# EAGLE board CT_schematic (EAGLE 7.6.0)

Size 100 x 80 mm. Coordinates in mm from the lower left corner, seen from the top.
Outline: 0,0 100,0 100,80 0,80 0,0
Copper layers (1*16): Top 0.035mm / dielectric 1.5mm / Bottom 0.035mm
Design rules "default": minimum track width 10mil, minimum drill 24mil, track to track 8mil, track to pad 8mil, pad to pad 8mil, via to via 8mil, smd to smd 8mil, copper to edge 40mil, drill to drill 8mil, minimum pad ring 10mil, minimum via ring 8mil, stop-mask expansion 4mil, vias tented up to drill 0mil, thermal gap 10mil

## Footprints (pad centres in the part's own frame; a part is rotated, then mirrored left to right if it is on the bottom)
C0603 = smd 0.8 x 0.8: 1 -0.762,0; 2 0.762,0
C0402 = smd 0.5 x 0.5: 1 -0.508,0; 2 0.508,0
C1210 = smd 1.2 x 2.5: 1 -1.524,0; 2 1.524,0
R0603 = smd 0.8 x 0.8: 1 -0.762,0; 2 0.762,0
EXV-9H = smd 3.505 x 1.676: 1 -2.857,0; 2 2.857,0
L0603 = smd 0.8 x 0.8: 1 -0.762,0; 2 0.762,0
IND25X25CZ = smd 2.489 x 3.429: 1 -2.718,0; 2 2.718,0
PJ-037B_PACKAGE = drill 3.7 square: 1 12,0 | drill 3.2 square: 2 6,0
TFBGA64 = smd 0.35 x 0.35: A1 -1.75,1.75; A2 -1.25,1.75; A3 -0.75,1.75; A4 -0.25,1.75; A5 0.25,1.75; A6 0.75,1.75; A7 1.25,1.75; A8 1.75,1.75; B1 -1.75,1.25; B2 -1.25,1.25; B3 -0.75,1.25; B4 -0.25,1.25; B5 0.25,1.25; B6 0.75,1.25; B7 1.25,1.25; B8 1.75,1.25; C1 -1.75,0.75; C2 -1.25,0.75; C3 -0.75,0.75; C4 -0.25,0.75; C5 0.25,0.75; C6 0.75,0.75; C7 1.25,0.75; C8 1.75,0.75; D1 -1.75,0.25; D2 -1.25,0.25; D3 -0.75,0.25; D4 -0.25,0.25; D5 0.25,0.25; D6 0.75,0.25; D7 1.25,0.25; D8 1.75,0.25; E1 -1.75,-0.25; E2 -1.25,-0.25; E3 -0.75,-0.25; E4 -0.25,-0.25; E5 0.25,-0.25; E6 0.75,-0.25; E7 1.25,-0.25; E8 1.75,-0.25; F1 -1.75,-0.75; F2 -1.25,-0.75; F3 -0.75,-0.75; F4 -0.25,-0.75; F5 0.25,-0.75; F6 0.75,-0.75; F7 1.25,-0.75; F8 1.75,-0.75; G1 -1.75,-1.25; G2 -1.25,-1.25; G3 -0.75,-1.25; G4 -0.25,-1.25; G5 0.25,-1.25; G6 0.75,-1.25; G7 1.25,-1.25; G8 1.75,-1.25; H1 -1.75,-1.75; H2 -1.25,-1.75; H3 -0.75,-1.75; H4 -0.25,-1.75; H5 0.25,-1.75; H6 0.75,-1.75; H7 1.25,-1.75; H8 1.75,-1.75
TST-110-05-T-D-RA = drill 1 pad 1.7 square: 1 0,0 | drill 1 pad 1.7: 2 0,2.54; 3 2.54,0; 4 2.54,2.54; 5 5.08,0; 6 5.08,2.54; 7 7.62,0; 8 7.62,2.54; 9 10.16,0; 10 10.16,2.54; 11 12.7,0; 12 12.7,2.54; 13 15.24,0; 14 15.24,2.54; 15 17.78,0; 16 17.78,2.54; 17 20.32,0; 18 20.32,2.54; 19 22.86,0; 20 22.86,2.54
LGA-16 = smd 1.5 x 0.4: 1 -2.1,0.975; 2 -2.1,0.325; 3 -2.1,-0.325; 4 -2.1,-0.975; 9 2.1,-0.975; 10 2.1,-0.325; 11 2.1,0.325; 12 2.1,0.975 | smd 0.4 x 1.5: 5 -0.975,-2.1; 6 -0.325,-2.1; 7 0.325,-2.1; 8 0.975,-2.1; 13 0.975,2.1; 14 0.325,2.1; 15 -0.325,2.1; 16 -0.975,2.1
SSOP-28 = smd 1.5 x 0.4: 1 -3.625,4.225; 2 -3.625,3.575; 3 -3.625,2.925; 4 -3.625,2.275; 5 -3.625,1.625; 6 -3.625,0.975; 7 -3.625,0.325; 8 -3.625,-0.325; 9 -3.625,-0.975; 10 -3.625,-1.625; 11 -3.625,-2.275; 12 -3.625,-2.925; 13 -3.625,-3.575; 14 -3.625,-4.225; 15 3.625,-4.225; 16 3.625,-3.575; 17 3.625,-2.925; 18 3.625,-2.275; 19 3.625,-1.625; 20 3.625,-0.975; 21 3.625,-0.325; 22 3.625,0.325; 23 3.625,0.975; 24 3.625,1.625; 25 3.625,2.275; 26 3.625,2.925; 27 3.625,3.575; 28 3.625,4.225
182-009-MALE = drill 1.194 pad 1.524 octagon: 1 -5.537,10.923; 2 -2.769,10.923; 3 0,10.923; 4 2.769,10.923; 5 5.537,10.923; 6 -4.153,8.08; 7 -1.384,8.08; 8 1.384,8.08; 9 4.153,8.08 | hole 3.048: -12.446,9.501; 12.446,9.501
USB-A-H = drill 0.914: 1 2.718,3.493; 2 2.718,1.003; 3 2.718,-1.003; 4 2.718,-3.493 | drill 2.311: 5 0,-6.566; 6 0,6.566
SOT143B = smd 1 x 0.7: 1 -0.75,-1 | smd 0.6 x 0.7: 2 0.95,-1; 3 0.95,1; 4 -0.95,1
ABLS-25.000MHZ-B2F-T = smd 5.6 x 2.8: 1 -3.81,0; 2 5.69,0
ASEK = smd 1.4 x 1: 1 -1.1,-0.8; 2 1.1,-0.8; 3 1.1,0.8; 4 -1.1,0.8
IR3899MTR1PBF = smd 0.25 x 0.75: 1 0,0; 2 0.5,0; 3 1,0; 4 1.5,0; 5 2,0; 6 2.5,0; 7 3,0 | smd 0.75 x 0.25: 8 3.425,0.78; 9 3.425,1.28; 10 3.425,1.78; 14 -0.425,1.78; 15 -0.425,1.28; 16 -0.425,0.78 | smd 0.3 x 1.95: 11 3.22,3.63 | smd 1.62 x 2.42: 12 1.786,3.8 | smd 1 x 1.95: 13 0.117,3.63 | smd 2.19 x 1.25: 17 1.51,1.26
SON-6 = smd 0.55 x 0.3: 1 -0.355,0.5 | smd 0.52 x 0.3: 2 -0.37,0; 3 -0.37,-0.5; 4 0.37,-0.5; 5 0.37,0; 6 0.37,0.5
SW_4-1437565-2 = smd 1.4 x 2.1: 1 -2.23,4.55; 2 -2.23,-4.55; 3 2.23,4.55; 4 2.23,-4.55
LGM67K-G1J2-24-Z = smd 0.8 x 1.4: A -2,0; C 0,0
NC7SZ125M5X = smd 1.3 x 0.7: 1 -1.3,0.95; 2 -1.3,0; 3 -1.3,-0.95; 4 1.3,-0.95; 5 1.3,0.95

## Placement (x,y rotation side)
C1  1e-07  [C0603]  -59.69,71.12 0 top  (outside the outline)
C2  1e-07  [C0603]  -63.5,71.12 0 top  (outside the outline)
C3  1e-07  [C0603]  -67.31,71.12 0 top  (outside the outline)
C4  1e-07  [C0603]  -71.12,71.12 0 top  (outside the outline)
C5  4.7e-06  [C0603]  -44.45,71.12 0 top  (outside the outline)
C6  1e-07  [C0603]  -74.93,71.12 0 top  (outside the outline)
C7  1e-08  [C0603]  -15.24,76.2 0 top  (outside the outline)
C8  1e-06  [C0603]  -19.05,76.2 0 top  (outside the outline)
C9  1e-11  [C0402]  -49.53,76.2 0 top  (outside the outline)
C10  1e-11  [C0402]  -53.34,76.2 0 top  (outside the outline)
C11  1e-07  [C0402]  -57.15,76.2 0 top  (outside the outline)
C12  1e-07  [C0402]  -60.96,76.2 0 top  (outside the outline)
C13  1e-08  [C0402]  -64.77,76.2 0 top  (outside the outline)
C14  1e-08  [C0402]  -68.58,76.2 0 top  (outside the outline)
C15  1e-08  [C0402]  -72.39,76.2 0 top  (outside the outline)
C16  4.7e-07  [C0603]  -48.26,71.12 0 top  (outside the outline)
C17  1e-07  [C0402]  -76.2,76.2 0 top  (outside the outline)
C18  1e-07  [C0402]  -15.24,81.28 0 top  (outside the outline)
C19  1e-07  [C0402]  -19.05,81.28 0 top  (outside the outline)
C20  1e-07  [C0402]  -22.86,81.28 0 top  (outside the outline)
C21  1e-07  [C0402]  -26.67,81.28 0 top  (outside the outline)
C22  1e-08  [C0402]  -30.48,81.28 0 top  (outside the outline)
C23  0.0001  [C1210]  -44.45,59.69 0 top  (outside the outline)
C24  2.2e-06  [C0603]  -52.07,71.12 0 top  (outside the outline)
C25  1e-07  [C0402]  -34.29,81.28 0 top  (outside the outline)
C26  1e-07  [C0402]  -38.1,81.28 0 top  (outside the outline)
C27  7.8444498006919e-09  [R0603]  -67.31,58.42 0 top  (outside the outline)
C28  2.7e-07  [C0603]  -55.88,71.12 0 top  (outside the outline)
C31  1e-07  [C0402]  -41.91,81.28 0 top  (outside the outline)
C32  0.0001  [EXV-9H]  -38.1,52.07 0 top  (outside the outline)
C33  0.0001  [EXV-9H]  -49.53,52.07 0 top  (outside the outline)
C34  1e-08  [C0402]  -45.72,81.28 0 top  (outside the outline)
C35  1e-08  [C0402]  -49.53,81.28 0 top  (outside the outline)
F1  240.0  [L0603]  -22.86,76.2 0 top  (outside the outline)
I1  6.8e-07  [IND25X25CZ]  -17.78,59.69 0 top  (outside the outline)
J1  PJ-037B  [PJ-037B_PACKAGE]  -39.37,29.21 0 top  (outside the outline)
R2  1000.0  [R0603]  -26.67,76.2 0 top  (outside the outline)
R4  4700.0  [R0603]  -30.48,76.2 0 top  (outside the outline)
R5  10000.0  [R0603]  -46.99,66.04 0 top  (outside the outline)
R6  10000.0  [R0603]  -52.07,66.04 0 top  (outside the outline)
R7  10000.0  [R0603]  -57.15,66.04 0 top  (outside the outline)
R8  10000.0  [R0603]  -62.23,66.04 0 top  (outside the outline)
R9  10000.0  [R0603]  -67.31,66.04 0 top  (outside the outline)
R10  10000.0  [R0603]  -72.39,66.04 0 top  (outside the outline)
R11  10000.0  [R0603]  -77.47,66.04 0 top  (outside the outline)
R12  10000.0  [R0603]  -15.24,71.12 0 top  (outside the outline)
R13  10000.0  [R0603]  -20.32,71.12 0 top  (outside the outline)
R14  100000.0  [R0603]  -31.75,66.04 0 top  (outside the outline)
R15  0.1  [R0603]  -34.29,76.2 0 top  (outside the outline)
R16  4030.2416170974  [R0603]  -74.93,58.42 0 top  (outside the outline)
R17  719.68600305311  [R0603]  -19.05,66.04 0 top  (outside the outline)
R18  64.984347826087  [R0603]  -26.67,66.04 0 top  (outside the outline)
R19  130.0  [R0603]  -38.1,76.2 0 top  (outside the outline)
R20  39000.0  [R0603]  -25.4,71.12 0 top  (outside the outline)
R21  49900.0  [R0603]  -30.48,71.12 0 top  (outside the outline)
R22  5600.0  [R0603]  -41.91,76.2 0 top  (outside the outline)
R23  10000.0  [R0603]  -35.56,71.12 0 top  (outside the outline)
R24  10000.0  [R0603]  -40.64,71.12 0 top  (outside the outline)
R25  9100.0  [R0603]  -45.72,76.2 0 top  (outside the outline)
R26  680000.0  [R0603]  -36.83,66.04 0 top  (outside the outline)
R27  120000.0  [R0603]  -41.91,66.04 0 top  (outside the outline)
U1  STM32L152RBH6  [TFBGA64]  -25.4,43.18 0 top  (outside the outline)
U2  TST-110-05-T-D-RA  [TST-110-05-T-D-RA]  -63.5,39.37 0 top  (outside the outline)
U3  l3g4200d  [LGA-16]  -25.4,59.69 0 top  (outside the outline)
U4  ST3241EBPR  [SSOP-28]  -19.05,30.48 0 top  (outside the outline)
U5  182-009-113R531  [182-009-MALE]  -36.83,6.35 0 top  (outside the outline)
U6  61400416021  [USB-A-H]  -59.69,8.89 0 top  (outside the outline)
U7  prtr5v0u2ax  [SOT143B]  -62.23,81.28 0 top  (outside the outline)
U8  ABLS-25.000MHZ-B2F-T  [ABLS-25.000MHZ-B2F-T]  -68.58,52.07 0 top  (outside the outline)
U9  ASEK-32.768KHz-ECST  [ASEK]  -29.21,52.07 0 top  (outside the outline)
U10  IR3899MTR1PBF  [IR3899MTR1PBF]  -72.39,25.4 0 top  (outside the outline)
U11  TPS3895ADRYR  [SON-6]  -66.04,80.01 0 top  (outside the outline)
U12  4-1437565-2  [SW_4-1437565-2]  -55.88,27.94 0 top  (outside the outline)
U13  Q65110A2395  [LGM67K-G1J2-24-Z]  -33.02,59.69 0 top  (outside the outline)
U14  nc7sz125m5x  [NC7SZ125M5X]  -49.53,58.42 0 top  (outside the outline)
U15  nc7sz125m5x  [NC7SZ125M5X]  -55.88,58.42 0 top  (outside the outline)

## Library data of the parts
C1-C28 C31-C35 F1 I1 J1 R2 R4-R27 U1-U15 = circuit_tree

## Nets
CLK_CRYSTAL_U1_C1: C9.1 U1.C1 U8.1
CLK_CRYSTAL_U1_D1: C10.1 U1.D1 U8.2
CLK_U1_A1: U1.A1 U9.3
GND: C1.2 C2.2 C3.2 C4.2 C5.2 C6.2 C7.2 C8.2 C9.2 C10.2 C11.2 C12.2 C13.2 C14.2 C15.2 C17.2 C20.2 C21.2 C22.2 C24.2 C25.2 C26.2 C31.2 C32.2 C33.2 C34.2 C35.2 J1.2 R2.2 R5.2 R11.2 R12.1 R12.2 R15.1 R15.2 R17.2 R20.2 R22.2 R25.2 R27.2 U1.C2 U1.D4 U1.D5 U1.D6 U1.F1 U2.4 U2.6 U2.8 U2.10 U2.12 U2.14 U2.16 U2.18 U2.20 U3.8 U3.9 U3.10 U3.11 U3.12 U3.13 U4.23 U4.25 U5.5 U6.4 U6.5 U6.6 U7.1 U9.2 U10.4 U10.11 U10.17 U11.2 U13.C U14.2 U14.3 U15.1 U15.3
NET_U1_B2: C6.1 U1.B2
NET_U1_B4: R5.1 U1.B4
NET_U1_E1: R4.1 U1.E1 U15.4
NET_U1_H1: C7.1 C8.1 F1.1 U1.G1 U1.H1
NET_U1_H7: U13.A
NET_U1_H8: U12.3 U12.4
NET_U2_19: R11.1 U2.19
NET_U3_14: C15.1 C16.1 U3.14
NET_U3_ATNET_1: C16.2
NET_U4_1: C19.1 U4.1
NET_U4_2: C19.2 U4.2
NET_U4_3: C21.1 U4.3
NET_U4_22: R14.1 U4.22
NET_U4_24: C18.2 U4.24
NET_U4_27: C20.1 U4.27
NET_U4_28: C18.1 U4.28
NET_U5_2: U4.4 U5.2
NET_U5_3: U4.9 U5.3
NET_U5_7: U4.5 U5.7
NET_U5_8: U4.10 U5.8
NET_U7_4: U6.1 U7.4
NET_U10_1: C27.1 R16.1 R17.1 R18.1 R19.1 U10.1 U10.8
NET_U10_2: C26.1 U10.2
NET_U10_3: C27.2 C28.1 C28.2 U10.3
NET_U10_5: R20.1 U10.5
NET_U10_10: C24.1 U10.10
NET_U10_12: C23.1 I1.1 U10.12
NET_U10_13: U10.13
NET_U10_14: C23.2 U10.14
NET_U10_15: R21.1 R22.1 U10.15
NET_U10_ATNET_3: I1.2 R16.2
NET_U10_ATNET_4: C28.2 R18.2
NET_U10_ATNET_5: R19.2
NET_U11_1: R24.1 R25.1 U11.1
NET_U11_3: R26.2 R27.1 U11.3
NET_U11_4: R23.1 U11.4 U14.4 U15.2
NET_U12_1: R2.1 U12.1 U12.2
PROC_SPI1_MISO: U1.G4 U3.4
PROC_SPI1_MOSI: U1.C4 U3.3
PROC_SPI1_NSS: R13.1 U1.H3 U3.5
PROC_SPI1_SCK: U1.F4 U3.2
PROC_SYS_JTCK_SWCLK: R9.1 U1.A7 U2.9
PROC_SYS_JTDI: R7.1 U1.A6 U2.5
PROC_SYS_JTDO_TRACESWO: U1.A5 U2.13
PROC_SYS_JTMS_SWDIO: R8.1 U1.A8 U2.7
PROC_SYS_JTRST: R6.1 U1.A4 U2.3
PROC_USART2_CTS: U1.G2 U4.13
PROC_USART2_RTS: U1.H2 U4.18
PROC_USART2_RX: U1.G3 U4.19
PROC_USART2_TX: U1.F3 U4.14
PROC_USB_DM: U1.C8 U6.2 U7.3
PROC_USB_DP: U1.B8 U6.3 U7.2
RST_OUT_U2_SRESET_B: R10.1 U2.15 U14.1
VCC_S1_16V1: C25.1 C32.1 C33.1 J1.1 R21.2 U10.9
VCC_TIER1_3V3: C1.1 C2.1 C3.1 C4.1 C5.1 C11.1 C12.1 C13.1 C14.1 C17.1 C22.1 C31.1 C34.1 C35.1 F1.2 I1.2 R4.2 R6.2 R7.2 R8.2 R9.2 R10.2 R13.2 R14.2 R16.2 R23.2 R24.2 R26.1 U1.D2 U1.E4 U1.E5 U1.E6 U2.1 U2.2 U3.1 U3.15 U3.16 U4.26 U9.4 U11.6 U14.5 U15.5

## Tracks (layer width: path | path; a pad name or v marks a point on that pad's centre or on a via)
CLK_CRYSTAL_U1_C1  (2 unrouted)
CLK_CRYSTAL_U1_D1  (2 unrouted)
CLK_U1_A1  (1 unrouted)
GND  (76 unrouted)
NET_U1_B2  (1 unrouted)
NET_U1_B4  (1 unrouted)
NET_U1_E1  (2 unrouted)
NET_U1_H1  (4 unrouted)
NET_U1_H8  (1 unrouted)
NET_U2_19  (1 unrouted)
NET_U3_14  (2 unrouted)
NET_U4_1  (1 unrouted)
NET_U4_2  (1 unrouted)
NET_U4_3  (1 unrouted)
NET_U4_22  (1 unrouted)
NET_U4_24  (1 unrouted)
NET_U4_27  (1 unrouted)
NET_U4_28  (1 unrouted)
NET_U5_2  (1 unrouted)
NET_U5_3  (1 unrouted)
NET_U5_7  (1 unrouted)
NET_U5_8  (1 unrouted)
NET_U7_4  (1 unrouted)
NET_U10_1  (6 unrouted)
NET_U10_2  (1 unrouted)
NET_U10_3  (3 unrouted)
NET_U10_5  (1 unrouted)
NET_U10_10  (1 unrouted)
NET_U10_12  (2 unrouted)
NET_U10_14  (1 unrouted)
NET_U10_15  (2 unrouted)
NET_U10_ATNET_3  (1 unrouted)
NET_U10_ATNET_4  (1 unrouted)
NET_U11_1  (2 unrouted)
NET_U11_3  (2 unrouted)
NET_U11_4  (3 unrouted)
NET_U12_1  (2 unrouted)
PROC_SPI1_MISO  (1 unrouted)
PROC_SPI1_MOSI  (1 unrouted)
PROC_SPI1_NSS  (2 unrouted)
PROC_SPI1_SCK  (1 unrouted)
PROC_SYS_JTCK_SWCLK  (2 unrouted)
PROC_SYS_JTDI  (2 unrouted)
PROC_SYS_JTDO_TRACESWO  (1 unrouted)
PROC_SYS_JTMS_SWDIO  (2 unrouted)
PROC_SYS_JTRST  (2 unrouted)
PROC_USART2_CTS  (1 unrouted)
PROC_USART2_RTS  (1 unrouted)
PROC_USART2_RX  (1 unrouted)
PROC_USART2_TX  (1 unrouted)
PROC_USB_DM  (2 unrouted)
PROC_USB_DP  (2 unrouted)
RST_OUT_U2_SRESET_B  (2 unrouted)
VCC_S1_16V1  (5 unrouted)
VCC_TIER1_3V3  (41 unrouted)